# Altium PCB ludi_cartridge_v1.PcbDoc
Units mil, origin at the board's own origin, x right, y up, seen from the top; angles counter-clockwise.
Board outline 970 x 970 mil, 2 copper layers (Top Layer, Bottom Layer); 6 components, 7 nets, 46 pads, 4 vias.
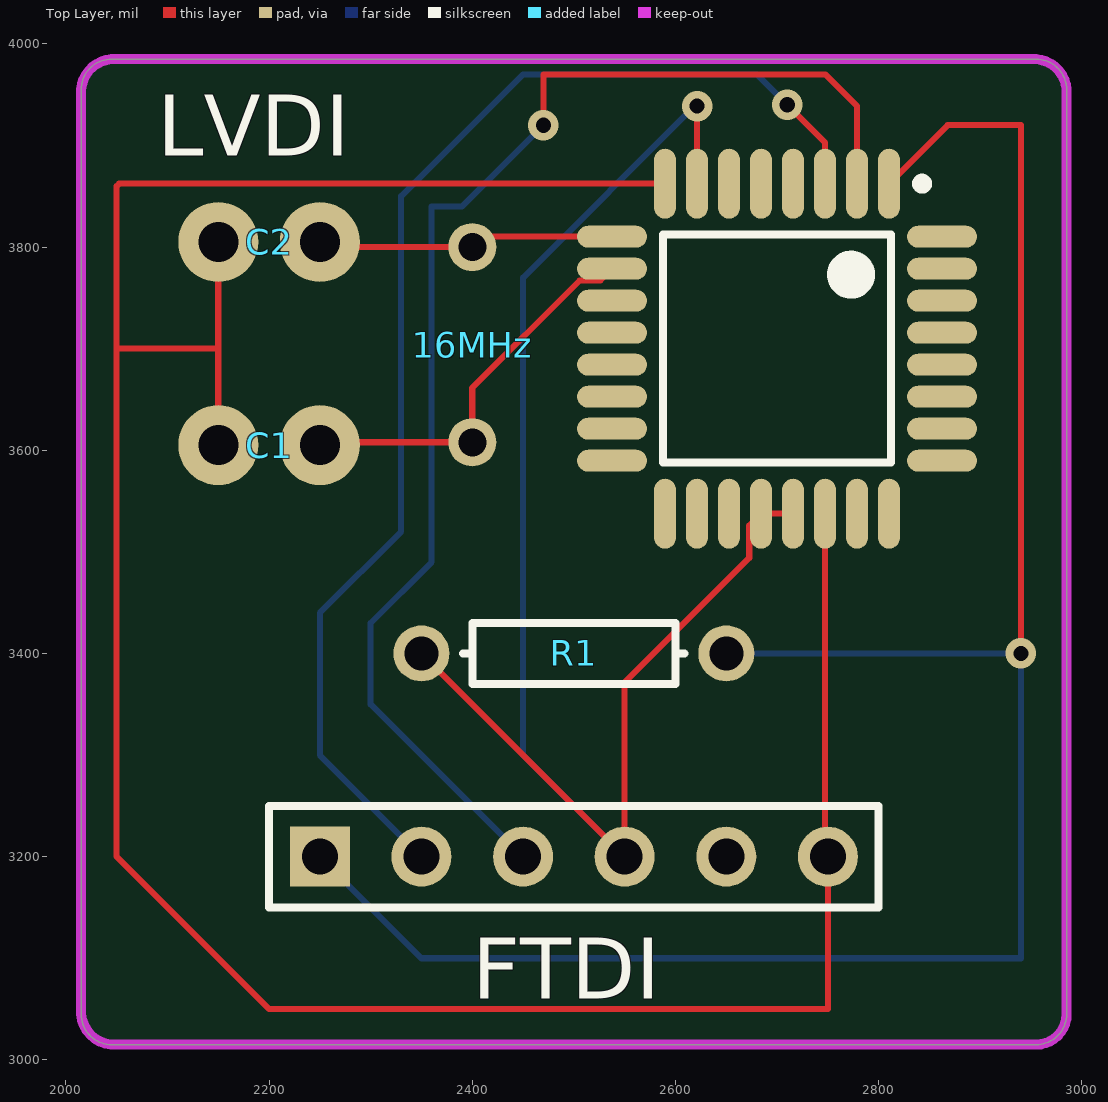
[diagram p0: Top Layer view]
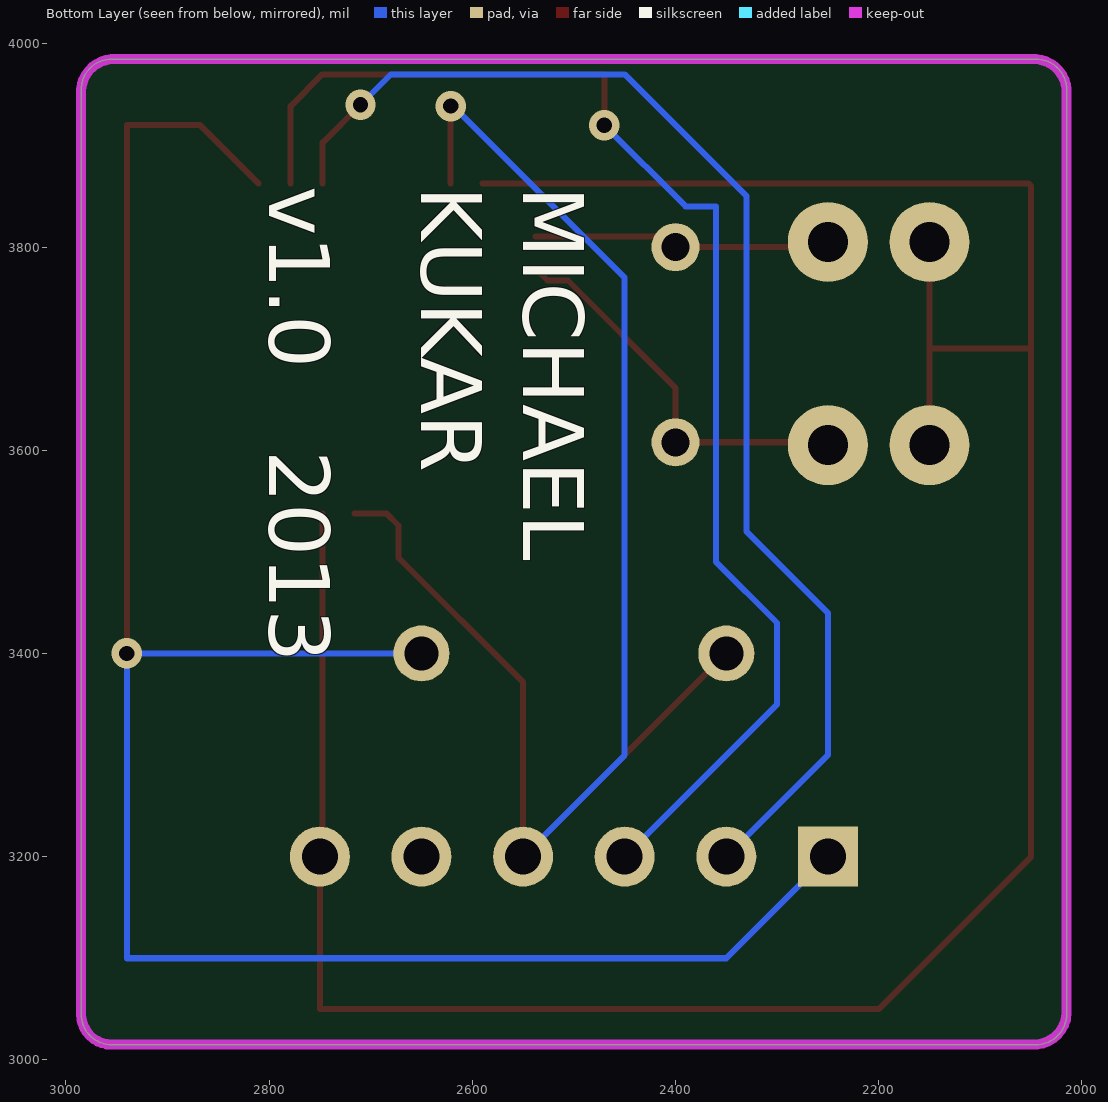
[diagram p1: Bottom Layer view, seen from below]

## Layer stack, top to bottom
Top Layer: signal copper 1.4
Dielectric: dielectric 12.6, FR-4, Dk 4.8
Bottom Layer: signal copper 1.4

## Board outline
2015,3045 2015,3955 cw(c2045,3955) 2045,3985 2955,3985 cw(c2955,3955) 2985,3955 2985,3045 cw(c2955,3045) 2955,3015 2045,3015 cw(c2045,3045)

## Design rules (kind name [scope] priority, off if disabled: settings)
Clearance [All] p1: gap=6
PolygonConnect [All] p1: connectstyle=Relief reliefconductorwidth=10 reliefentries=4 polygonreliefangle="90 Angle"
RoomDefinition ludi_cartridge_v1 [InComponentClass('ludi_cartridge_v1')] p1: confinementstyle=ConfineIn formatcopy=TRUE lockcomponents=FALSE outline 3045,2960 4555,2960 4555,3680 3045,3680
RoutingVias [All] p1: holewidth=13 width=20 viastyle="Through Hole" minholewidth=28 minwidth=50 maxholewidth=28 maxwidth=50
SilkscreenOverComponentPads [All] p1: minsilkscreentomaskgap=10
SolderMaskExpansion [All] p1: expansion=4
Width [All] p1: maxlimit=6 minlimit=6 preferedwidth=6
27 further rules are at their usual default settings.

## Components (designator, comment, footprint, x,y, rotation, side; value= is the part's Value field where it differs from the comment)
16MHz "Crystal" "Crystal - duplicate" 2400,3800 r270 top
C1 "Cap" ".1\" spacing" 2140,3610 r0 top
C2 "Cap" ".1\" spacing" 2140,3810 r0 top
FTDI "6-Pin Female Header" HDR1X6 2250,3200 r0 top
LVDI "Atmega328" AtmegaTQFP 2700,3700 r270 top (schematic designator Arduino)
R1 "Res1" AXIAL-0.3 2500,3400 r0 top

## Footprints (in the part's own frame and the unit in brackets; to place one, negate y for a bottom-side part, rotate by r counter-clockwise, add the part's x,y. Pads: shape width x height; smd on the part's side, far side on the other; paste and mask are expansions set on the pad)
".1\" spacing" [mm]
  round 2 hole 1 mask+0.025: 1(0.254,-0.127) 2(2.794,-0.127)
AtmegaTQFP [mm]
  oval 1.75x0.55 smd: 1(-4.125,2.8) 2(-4.125,2) 3(-4.125,1.2) 4(-4.125,0.4) 5(-4.125,-0.4) 6(-4.125,-1.2) 7(-4.125,-2) 8(-4.125,-2.8) 17(4.125,-2.8) 18(4.125,-2) 19(4.125,-1.2) 20(4.125,-0.4) 21(4.125,0.4) 22(4.125,1.2) 23(4.125,2) 24(4.125,2.8)
  oval 0.55x1.75 smd: 9(-2.8,-4.125) 10(-2,-4.125) 11(-1.2,-4.125) 12(-0.4,-4.125) 13(0.4,-4.125) 14(1.2,-4.125) 15(2,-4.125) 16(2.8,-4.125) 25(2.8,4.125) 26(2,4.125) 27(1.2,4.125) 28(0.4,4.125) 29(-0.4,4.125) 30(-1.2,4.125) 31(-2,4.125) 32(-2.8,4.125)
  silkscreen extent -4.25,-2.85 2.85,3.75, body extent -3.5,-3.5 3.5,3.5, height 1.2
AXIAL-0.3 [mm] "Axial Device, Thru-Hole; 2 Leads; 0.3 in Pin Spacing"
  round 1.4 hole 0.85: 1(-3.81,0) 2(3.81,0)
  silkscreen extent -2.77,-0.76 2.77,0.76
"Crystal - duplicate" [mm]
  round 1.2 hole 0.7: A(0,0) K(4.88,0)
HDR1X6 [mm] "Connector; Header; 6 Position"
  rect 1.5x1.5 hole 0.9: 1(0,0)
  round 1.5 hole 0.9: 2(2.54,0) 3(5.08,0) 4(7.62,0) 5(10.16,0) 6(12.7,0)
  silkscreen extent -1.27,-1.27 13.97,1.27

## Part data
C1 C2: "Capacitor"
R1: "Resistor"

## Via types
v1: diameter 30, hole 15, Top Layer to Bottom Layer, 4 vias

## Nets (pads, with @x,y where several pads share a name; then routed paths per layer and width w, separated by ;. In a path a pad name is that pad's centre, name@x,y a point inside that pad or via, vN(x,y) a via of type N, cw(c..) or ccw(c..) an arc to the next point about the centre after c; other vN are vias at no path point)
5V: FTDI.4 LVDI.7 LVDI.20 LVDI.21 R1.1 | length 1637.5
  Top Layer w6: R1.1 FTDI.4 2550,3371.57 2672.58,3494.15 2672.58,3525.93 LVDI.20 LVDI.21 ; v1@2620,3940 v1(2621.26,3938.74) LVDI.7
  Bottom Layer w6: FTDI.4 2450,3300 2450,3770 v1@2620,3940
GND: C1.1 C2.1 FTDI.6 LVDI.8 LVDI.22 | length 2751.6
  Top Layer w6: C1.1 2150,3700 ; C2.1 2150,3700 ; LVDI.8 2052.4,3862.4 2050,3860 2050,3700 ; LVDI.22 2747.24,3202.76 FTDI.6 2750,3050 2200,3050 2050,3200 2050,3700 ; 2050,3700 2150,3700
Net16MHz_A: 16MHz.A C2.2 LVDI.9 | length 293.9
  Top Layer w6: C2.2 2255,3800 16MHz.A 2410.24,3810.24 LVDI.9
Net16MHz_K: 16MHz.K C1.2 LVDI.10 | length 390.9
  Top Layer w6: C1.2 2252.87,3607.87 16MHz.K 2400,3661.31 2505.76,3767.07 2525.93,3767.07 LVDI.10
NetArduino_1: FTDI.1 LVDI.1 R1.2 | length 1995
  Top Layer w6: LVDI.1 2867.83,3920 2940,3920 v1(2940,3400)
  Bottom Layer w6: FTDI.1 2350,3100 2940,3100 v1(2940,3400) R1.2
NetArduino_2: FTDI.3 LVDI.2 | length 1318.1
  Top Layer w6: v1(2470,3920) 2470,3970 2747.48,3970 2778.74,3938.74 LVDI.2
  Bottom Layer w6: FTDI.3 2300,3350 2300,3430 2360,3490 2360,3840 2390,3840 v1(2470,3920)
NetArduino_3: FTDI.2 LVDI.3 | length 1259.7
  Top Layer w6: v1(2710,3940) 2747.24,3902.76 LVDI.3
  Bottom Layer w6: FTDI.2 2250,3300 2250,3440 2330,3520 2330,3850 2450,3970 2680,3970 v1(2710,3940)
pads on no net: FTDI.5 LVDI.4 LVDI.5 LVDI.6 LVDI.11 LVDI.12 LVDI.13 LVDI.14 LVDI.15 LVDI.16 LVDI.17 LVDI.18 LVDI.19 LVDI.23 LVDI.24 LVDI.25 LVDI.26 LVDI.27 LVDI.28 LVDI.29 LVDI.30 LVDI.31 LVDI.32

## Keep-outs
Keep-Out Layer:
  lines w10: 2015,3950 cw(c2047.5,3952.5) 2045,3985 2955,3985 cw(c2952.5,3952.5) 2985,3950 ; 2015,3955 2015,3045 ccw(c2047.5,3047.5) 2050,3015 ; 2045,3015 2955,3015 ccw(c2955,3045) 2985,3045 2985,3955

## Silkscreen, mask and mechanical layers (free items; w line width, h text height)
Bottom Overlay:
  text "MICHAEL" at 2550,3860 h60 r90
  text "KUKAR" at 2650,3860 h60 r90
  text "v1.0" at 2800,3860 h60 r90
  text "2013" at 2800,3600 h60 r90
Drill Drawing:
  text ".LEGEND" at 3200,3200 h60
  text "Drill Drawing." at 3200,3100 h60

## Dimensions
2015,3045 to 2045,3015 on Mechanical 1
2045,3015 to 2015,3045 on Mechanical 1